# EAGLE board untitleda (EAGLE 9.5.2)
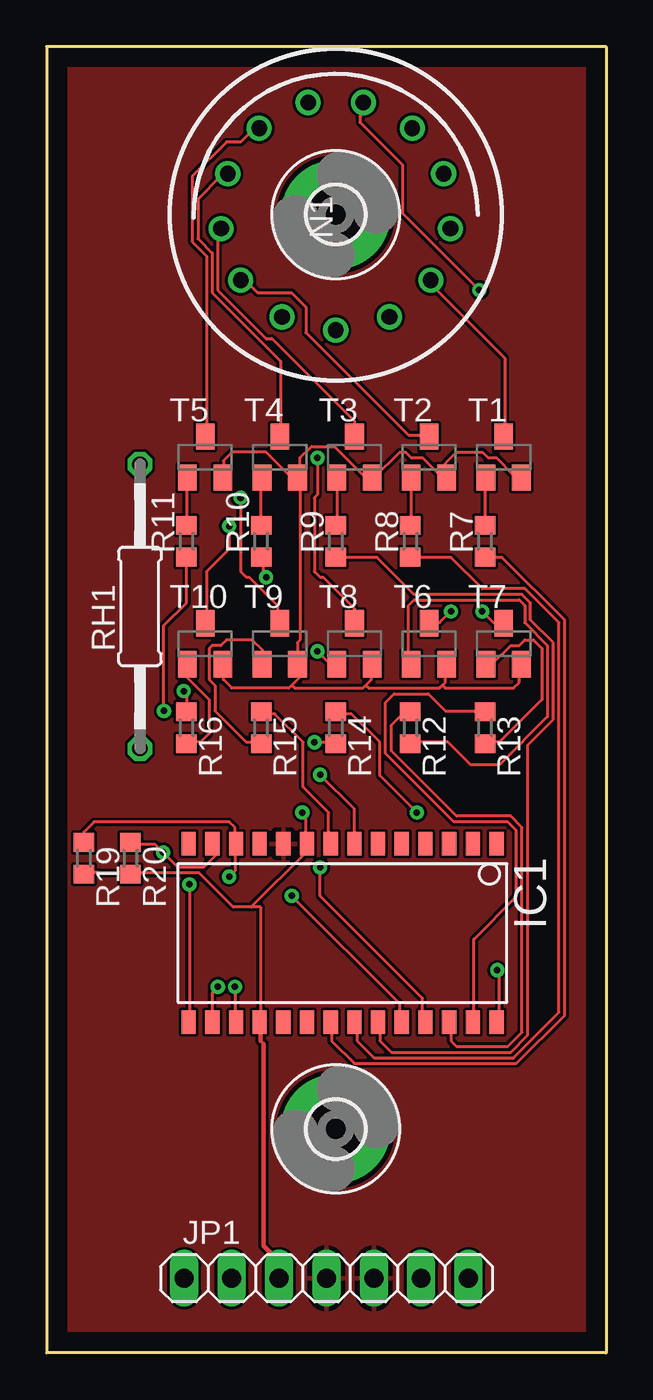
[diagram p0: board, top side]
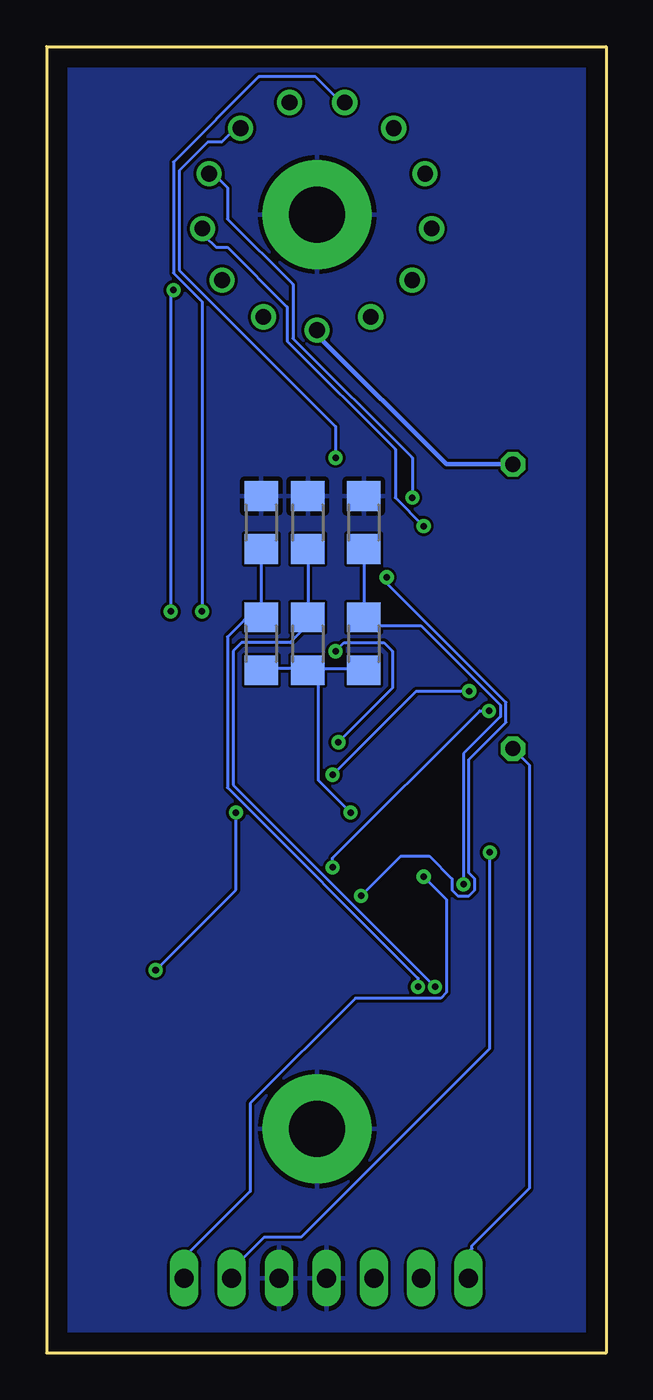
[diagram p1: board, bottom side, seen from below]

Size 30 x 70 mm. Coordinates in mm from the lower left corner, seen from the top.
Outline: 30,70 0,70 0,0 30,0 30,70
Copper layers (1*16): Top 0.035mm / dielectric 1.5mm / Bottom 0.035mm
Design rules "default *": minimum track width 6mil, minimum drill 0.35mm, track to track 6mil, track to pad 6mil, pad to pad 6mil, via to via 6mil, smd to smd 6mil, copper to edge 40mil, drill to drill 6mil, minimum pad ring 10mil, minimum via ring 8mil, stop-mask expansion 4mil, vias tented up to drill 0mil, thermal gap 10mil

## Footprints (pad centres in the part's own frame; a part is rotated, then mirrored left to right if it is on the bottom)
3,0-PAD = drill 3 pad 5.842: B3,0 0,0
SO28W = smd 0.762 x 1.27: 1 -7.62,-4.78; 2 -6.35,-4.78; 3 -5.08,-4.78; 4 -3.81,-4.78; 5 -2.54,-4.78; 6 -1.27,-4.78; 7 0,-4.78; 8 1.27,-4.78; 9 2.54,-4.78; 10 3.81,-4.78; 11 5.08,-4.78; 12 6.35,-4.78; 13 7.62,-4.78; 14 8.89,-4.78; 15 8.89,4.78; 16 7.62,4.78; 17 6.35,4.78; 18 5.08,4.78; 19 3.81,4.78; 20 2.54,4.78; 21 1.27,4.78; 22 0,4.78; 23 -1.27,4.78; 24 -2.54,4.78; 25 -3.81,4.78; 26 -5.08,4.78; 27 -6.35,4.78; 28 -7.62,4.78
1X07 = drill 1.016 long: 1 -7.62,0; 2 -5.08,0; 3 -2.54,0; 4 0,0; 5 2.54,0; 6 5.08,0; 7 7.62,0
IN-14 = drill 0.84: 0 5.094,-3.516; 1 -5.094,-3.516; 2 -6.145,-0.746; 3 -5.788,2.195; 4 -4.105,4.633; 5 -1.481,6.01; 6 1.481,6.01; 7 4.105,4.633; 8 5.788,2.195; 9 6.145,-0.746; A 0,-6.19; LHDP 2.877,-5.481; RHDP -2.877,-5.481
R1206 = smd 1.6 x 1.803: 1 -1.422,0; 2 1.422,0
R0603 = smd 1 x 1.1: 1 -0.85,0; 2 0.85,0
0207/15 = drill 0.813 octagon: 1 -7.62,0; 2 7.62,0
SOT23-BEC = smd 1 x 1.4: B -0.95,-1.1; C 0,1.1; E 0.95,-1.1

## Placement (x,y rotation side)
H1  MOUNT-PAD-ROUND3.0  [3,0-PAD]  15.5,12 0 top
H2  MOUNT-PAD-ROUND3.0  [3,0-PAD]  15.5,61 0 top
IC1  MCP23017SO  [SO28W]  16.5,22.5 180 top
JP1  [1X07]  15,4 0 top
N1  IN-14  [IN-14]  15.5,61 0 top
R1  0Ω  [R1206]  13,38 90 bottom
R2  0Ω  [R1206]  16,38 90 bottom
R3  0Ω  [R1206]  18.5,38 90 bottom
R4  0Ω  [R1206]  18.5,44.5 90 bottom
R5  0Ω  [R1206]  16,44.5 90 bottom
R6  0Ω  [R1206]  13,44.5 90 bottom
R7  [R0603]  23.5,43.5 90 top
R8  [R0603]  19.5,43.5 90 top
R9  [R0603]  15.5,43.5 90 top
R10  [R0603]  11.5,43.5 90 top
R11  [R0603]  7.5,43.5 90 top
R12  [R0603]  19.5,33.5 270 top
R13  [R0603]  23.5,33.5 270 top
R14  [R0603]  15.5,33.5 270 top
R15  [R0603]  11.5,33.5 270 top
R16  [R0603]  7.5,33.5 270 top
R19  [R0603]  2,26.5 270 top
R20  [R0603]  4.5,26.5 270 top
RH1  33KΩ  [0207/15]  5,40 270 top
T1  [SOT23-BEC]  24.5,48 0 top
T2  [SOT23-BEC]  20.5,48 0 top
T3  [SOT23-BEC]  16.5,48 0 top
T4  [SOT23-BEC]  12.5,48 0 top
T5  [SOT23-BEC]  8.5,48 0 top
T6  [SOT23-BEC]  20.5,38 0 top
T7  [SOT23-BEC]  24.5,38 0 top
T8  [SOT23-BEC]  16.5,38 0 top
T9  [SOT23-BEC]  12.5,38 0 top
T10  [SOT23-BEC]  8.5,38 0 top

## Library data of the parts
H1 H2 = holes
IC1 = adafruit
JP1 = pinhead
N1 = russian-nixies
R1-R16 R19 R20 RH1 = resistor
T1-T10 = transistor

## Nets
A0: IC1.15 R1.2 R6.1
A1: IC1.16 R2.2 R5.1
A2: IC1.17 R3.2 R4.1
GND: H1.B3,0 H2.B3,0 IC1.10 JP1.4 JP1.5 R4.2 R5.2 R6.2
KAT0: IC1.21 R7.1
KAT1: IC1.22 R8.1
KAT2: IC1.23 R9.1
KAT3: IC1.24 R10.1
KAT4: IC1.25 R11.1
KAT5: IC1.26 R12.1
KAT6: IC1.27 R13.1
KAT7: IC1.28 R14.1
KAT8: IC1.8 R15.1
KAT9: IC1.7 R16.1
N$1: T1.E T2.E T3.E T4.E T5.E T6.E T7.E T8.E T9.E T10.E
N$2: R7.2 T1.B
N$3: R16.2 T10.B
N$4: R15.2 T9.B
N$5: R14.2 T8.B
N$6: R13.2 T7.B
N$7: R12.2 T6.B
N$8: R11.2 T5.B
N$9: R10.2 T4.B
N$10: R9.2 T3.B
N$11: R8.2 T2.B
SCL: IC1.12 JP1.7 R19.1
SDA: IC1.13 JP1.6 R20.1
T0: N1.0 T1.C
T1: N1.1 T2.C
T2: N1.2 T3.C
T3: N1.3 T4.C
T4: N1.4 T5.C
T5: N1.5 T6.C
T6: N1.6 T7.C
T7: N1.7 T8.C
T8: N1.8 T9.C
T9: N1.9 T10.C
TUBE_A: N1.A RH1.1
VCC: IC1.9 IC1.18 JP1.3 R1.1 R2.1 R3.1 R19.2 R20.2
VCCHV: JP1.1 RH1.2

## Tracks (layer width: path | path; a pad name or v marks a point on that pad's centre or on a via)
A0  (via drill 0.35)
  Top 0.152: v7.65,25.1 7.65,17.79 IC1.15
  Bottom 0.152: R6.1 R1.2 12.99,39.28 12.68,38.97 9.94,38.97 5.67,34.71 5.67,34.1 7.65,32.12 v7.65,25.1
A1  (via drill 0.35)
  Top 0.152: v9.18,19.62 8.87,19.31 8.87,17.79 IC1.16
  Bottom 0.152: R5.1 R2.2 16.04,39.28 16.04,38.97 16.95,38.06 19.54,38.06 20,37.6 20,30.44 v9.18,19.62
A2  (via drill 0.35)
  Top 0.152: v10.09,19.62 10.09,17.79 IC1.17
  Bottom 0.152: R4.1 R3.2 18.63,39.28 19.39,39.28 20.3,38.36 20.3,30.29 10.09,20.07 v10.09,19.62
GND
  pour Top: 0,70 0,0 30,0 30,70
  pour Bottom: 0,70 0,0 30,0 30,70
KAT0
  Top 0.152: R7.1 23.5,42.63 24.42,42.63 27.77,39.28 27.77,18.09 25.18,15.5 16.49,15.5 15.27,16.72 15.27,17.64 IC1.21
KAT1
  Top 0.152: R8.1 19.54,42.63 21.68,42.63 23.35,40.95 25.64,40.95 27.47,39.12 27.47,18.25 25.03,15.81 17.56,15.81 16.65,16.72 16.65,17.64 IC1.22
KAT2
  Top 0.152: R9.1 15.58,42.63 17.71,42.63 19.69,40.65 25.48,40.65 25.94,40.19 25.94,39.28 27.16,38.06 27.16,33.94 25.79,32.57 25.79,17.03 24.88,16.11 18.48,16.11 17.86,16.72 17.86,17.64 IC1.23
KAT3  (via drill 0.35)
  Top 0.152: v11.77,41.56 11.62,41.72 11.62,42.63 R10.1 | v13.14,24.5 18.93,18.7 18.93,17.79 IC1.24
  Bottom 0.152: v11.77,41.56 11.77,41.26 5.37,34.86 5.37,33.79 7.35,31.81 7.35,25.71 7.04,25.41 7.04,24.8 7.35,24.5 7.96,24.5 8.26,24.8 8.26,25.41 9.48,26.63 11.01,26.63 v13.14,24.5
KAT4  (via drill 0.35)
  Top 0.152: v6.28,34.4 6.28,38.97 7.5,40.19 7.5,42.63 R11.1 | v14.66,26.02 14.66,24.5 20.15,19.01 20.15,17.94 20.3,17.79 IC1.25
  Bottom 0.152: v6.28,34.4 6.78,34.4 14.66,26.52 v14.66,26.02
KAT5
  Top 0.152: R12.1 19.39,34.25 19.08,34.25 18.48,33.64 18.48,32.27 21.98,28.76 24.88,28.76 25.48,28.15 25.48,17.18 24.72,16.42 21.98,16.42 21.68,16.72 21.68,17.64 IC1.26
KAT6
  Top 0.152: R13.1 23.35,34.4 21.37,34.4 20.46,35.31 18.63,35.31 18.17,34.86 18.17,32.12 21.83,28.46 24.72,28.46 25.18,28 25.18,24.45 22.89,22.16 22.89,17.79 IC1.27
KAT7  (via drill 0.35)
  Top 0.152: v19.85,28.96 17.86,30.94 17.86,32.72 16.34,34.25 15.58,34.25 R14.1 | v24.16,20.51 24.27,20.4 24.27,17.79 IC1.28
  Bottom 0.152: v19.85,28.96 19.85,24.82 v24.16,20.51
KAT8
  Top 0.152: R15.1 11.62,34.25 12.23,34.25 13.75,32.72 13.75,30.33 15.12,28.96 15.12,27.39 IC1.8
KAT9  (via drill 0.35)
  Top 0.152: v7.35,35.47 7.5,35.31 7.5,34.4 R16.1 | v14.66,30.98 16.49,29.15 16.49,27.39 IC1.7
  Bottom 0.152: v7.35,35.47 10.18,35.47 v14.66,30.98
N$1
  Top 0.152: 13.14,35.77 13.6,36.23 13.6,36.84 T9.E 13.45,36.99 13.45,38.06 13.6,38.21 13.6,46.9 T4.E | 13.14,35.77 12.99,35.62 9.94,35.62 9.48,36.08 9.48,36.84 T10.E | 17.1,35.77 16.95,35.62 13.29,35.62 13.14,35.77 | 17.1,35.77 17.41,36.08 17.41,36.84 T8.E | 21.22,35.77 21.07,35.62 17.26,35.62 17.1,35.77 | 21.22,35.77 21.37,35.92 21.37,36.84 T6.E | 21.22,35.77 21.37,35.62 25.03,35.62 25.33,35.92 25.33,36.84 T7.E | T5.E 9.48,47.05 9.48,47.81 9.94,48.27 11.77,48.27 12.99,47.05 13.45,47.05 T4.E | T4.E 13.6,47.05 13.6,47.96 14.21,48.57 15.43,48.57 16.95,47.05 17.41,47.05 T3.E 17.56,46.9 18.93,48.27 19.24,48.27 19.54,47.96 20.15,47.96 20.91,47.2 | 20.91,47.2 21.07,47.05 21.37,47.05 T2.E | 20.91,47.2 21.98,48.27 23.35,48.27 23.66,47.96 24.11,47.96 25.03,47.05 25.33,47.05 T1.E
N$2
  Top 0.152: R7.2 23.5,44.46 23.5,46.9 T1.B
N$3
  Top 0.152: R16.2 7.5,32.72 8.26,32.72 8.72,33.18 8.72,35.01 7.5,36.23 7.5,36.84 T10.B
N$4
  Top 0.152: R15.2 11.46,32.72 10.7,32.72 9.03,34.4 9.03,35.77 8.72,36.08 8.72,37.75 8.87,37.91 9.33,37.91 9.64,38.21 11.01,38.21 11.62,37.6 11.62,36.99 T9.B
N$5  (via drill 0.35)
  Top 0.152: v14.36,32.72 15.43,32.72 R14.2 | v14.51,37.6 15.12,36.99 15.43,36.99 T8.B
  Bottom 0.152: v14.36,32.72 11.46,35.62 11.46,37.6 11.92,38.06 14.05,38.06 v14.51,37.6
N$6
  Top 0.152: R13.2 23.5,32.72 24.27,32.72 26.55,35.01 26.55,37.75 26.09,38.21 25.64,38.21 25.33,37.91 24.88,37.91 23.96,36.99 23.66,36.99 T7.B
N$7
  Top 0.152: R12.2 19.54,32.72 21.52,32.72 22.74,31.5 24.27,31.5 26.86,34.1 26.86,37.91 25.64,39.12 25.64,40.04 25.33,40.34 19.69,40.34 19.39,40.04 19.39,37.14 19.54,36.99 T6.B
N$8
  Top 0.152: R11.2 7.5,44.46 7.5,46.9 T5.B
N$9
  Top 0.152: R10.2 11.46,44.46 11.46,46.9 T4.B
N$10
  Top 0.152: R9.2 15.58,44.46 15.58,46.9 T3.B
N$11
  Top 0.152: R8.2 19.54,44.46 T2.B
SCL  (via drill 0.35)
  Top 0.152: R19.1 2,27.92 2.54,28.46 9.79,28.46 10.09,28.15 10.09,27.39 IC1.12 10.09,27.24 10.09,25.82 v9.79,25.52
  Bottom 0.152: v9.79,25.52 8.57,24.3 8.57,19.31 8.87,19.01 13.45,19.01 19.08,13.37 19.08,8.64 22.59,5.14 22.59,4.07 JP1.7
SDA  (via drill 0.35)
  Top 0.152: R20.1 4.56,27.24 5.83,27.24 v6.24,26.82 7.04,26.02 8.42,26.02 9.03,26.63 9.03,27.24 IC1.13
  Bottom 0.152: v6.24,26.82 6.24,16.31 16.34,6.21 18.32,6.21 20,4.53 20,4.07 JP1.6
T0
  Top 0.152: T1.C 24.57,49.18 24.57,53.3 20.46,57.41 N1.0
T1
  Top 0.152: T2.C 20.46,49.18 19.39,49.18 13.9,54.67 13.9,56.04 13.14,56.8 11.31,56.8 10.55,57.57 N1.1
T2
  Top 0.152: T3.C 16.49,49.18 16.49,49.95 12.07,54.36 11.77,54.36 9.18,56.96 9.18,60 9.33,60.16 N1.2
T3
  Top 0.152: T4.C 12.53,49.18 12.53,53.15 8.87,56.8 8.87,58.94 8.11,59.7 8.11,61.83 9.33,63.05 9.64,63.05 N1.3
T4
  Top 0.152: T5.C 8.57,49.18 8.57,58.78 7.81,59.55 7.81,63.05 9.64,64.88 10.4,64.88 11.01,65.49 11.31,65.49 N1.4
T5  (via drill 0.35)
  Top 0.152: v21.68,39.73 21.07,39.12 20.61,39.12 T6.C
  Bottom 0.152: v21.68,39.73 21.68,56.35 23.2,57.87 23.2,63.81 18.63,68.39 15.58,68.39 14.05,66.86 N1.5
T6  (via drill 0.35)
  Top 0.152: v23.35,39.73 23.96,39.12 24.42,39.12 T7.C | v23.2,56.96 19.08,61.07 19.08,63.66 16.8,65.95 16.8,66.25 16.95,66.41 16.95,66.86 N1.6
  Bottom 0.152: v23.35,39.73 23.35,56.8 v23.2,56.96
T7  (via drill 0.35)
  Top 0.152: v14.51,47.96 14.51,45.98 14.36,45.83 14.36,41.87 14.66,41.56 14.82,41.56 16.49,39.89 16.49,39.12 T8.C
  Bottom 0.152: v14.51,47.96 14.51,49.64 22.89,58.02 22.89,63.36 21.37,64.88 20.61,64.88 20,65.49 19.69,65.49 N1.7
T8  (via drill 0.35)
  Top 0.152: v10.4,45.83 10.4,41.87 10.7,41.56 10.86,41.56 12.38,40.04 12.38,39.12 T9.C
  Bottom 0.152: v10.4,45.83 10.4,47.96 16.8,54.36 16.8,57.26 20.3,60.77 20.3,62.44 20.91,63.05 21.22,63.05 N1.8
T9  (via drill 0.35)
  Top 0.152: v9.79,44.31 9.79,43.09 8.57,41.87 8.57,39.12 T10.C
  Bottom 0.152: v9.79,44.31 11.31,45.83 11.31,48.42 17.1,54.21 17.1,56.04 20.3,59.24 20.91,59.24 21.52,59.85 21.52,60.16 N1.9
TUBE_A
  Bottom 0.254: N1.A 15.5,54.55 8.57,47.62 RH1.1
VCC  (via drill 0.35)
  Top 0.152: 10.96,23.88 13.9,26.82 13.9,27.24 IC1.9 13.9,27.39 13.9,28.76 v13.71,28.96 | 10.96,23.88 11.46,23.88 11.46,17.79 IC1.18 11.46,17.64 | 10.96,23.88 10.01,23.88 8.18,25.71 5.06,25.71 5,25.75 | 11.46,16.72 11.62,16.57 | 12.38,4.07 JP1.3 | 5,25.75 4.75,25.75 4.75,25.71 2.75,25.71 2.75,25.75 2,25.75 R19.2 | R20.2 4.5,26.03 5,25.75
  Top 0.254: 12.38,4.07 12.38,4.99 11.62,5.75 11.62,16.57 | 11.46,17.64 11.46,16.72
  Bottom 0.152: 15.43,36.69 15.88,36.69 R2.1 | 15.43,36.69 13.14,36.69 R1.1 | R3.1 18.48,36.69 16.04,36.69 R2.1 | 15.43,36.69 15.43,30.68 v13.71,28.96 | 15.43,36.69 R2.1
VCCHV
  Bottom 0.152: RH1.2 4.13,31.51 4.13,8.82 7.2,5.75 7.2,5.6 7.35,5.45 7.35,4.07 JP1.1